# Altium PCB P1.PcbDoc
Units mm, origin at the board's own origin, x right, y up, seen from the top; angles counter-clockwise.
Board outline 82.04 x 67.06 mm, 2 copper layers (Top Layer, Bottom Layer), stack 1.671 mm thick; 22 components, 11 nets, 57 pads, 0 vias.
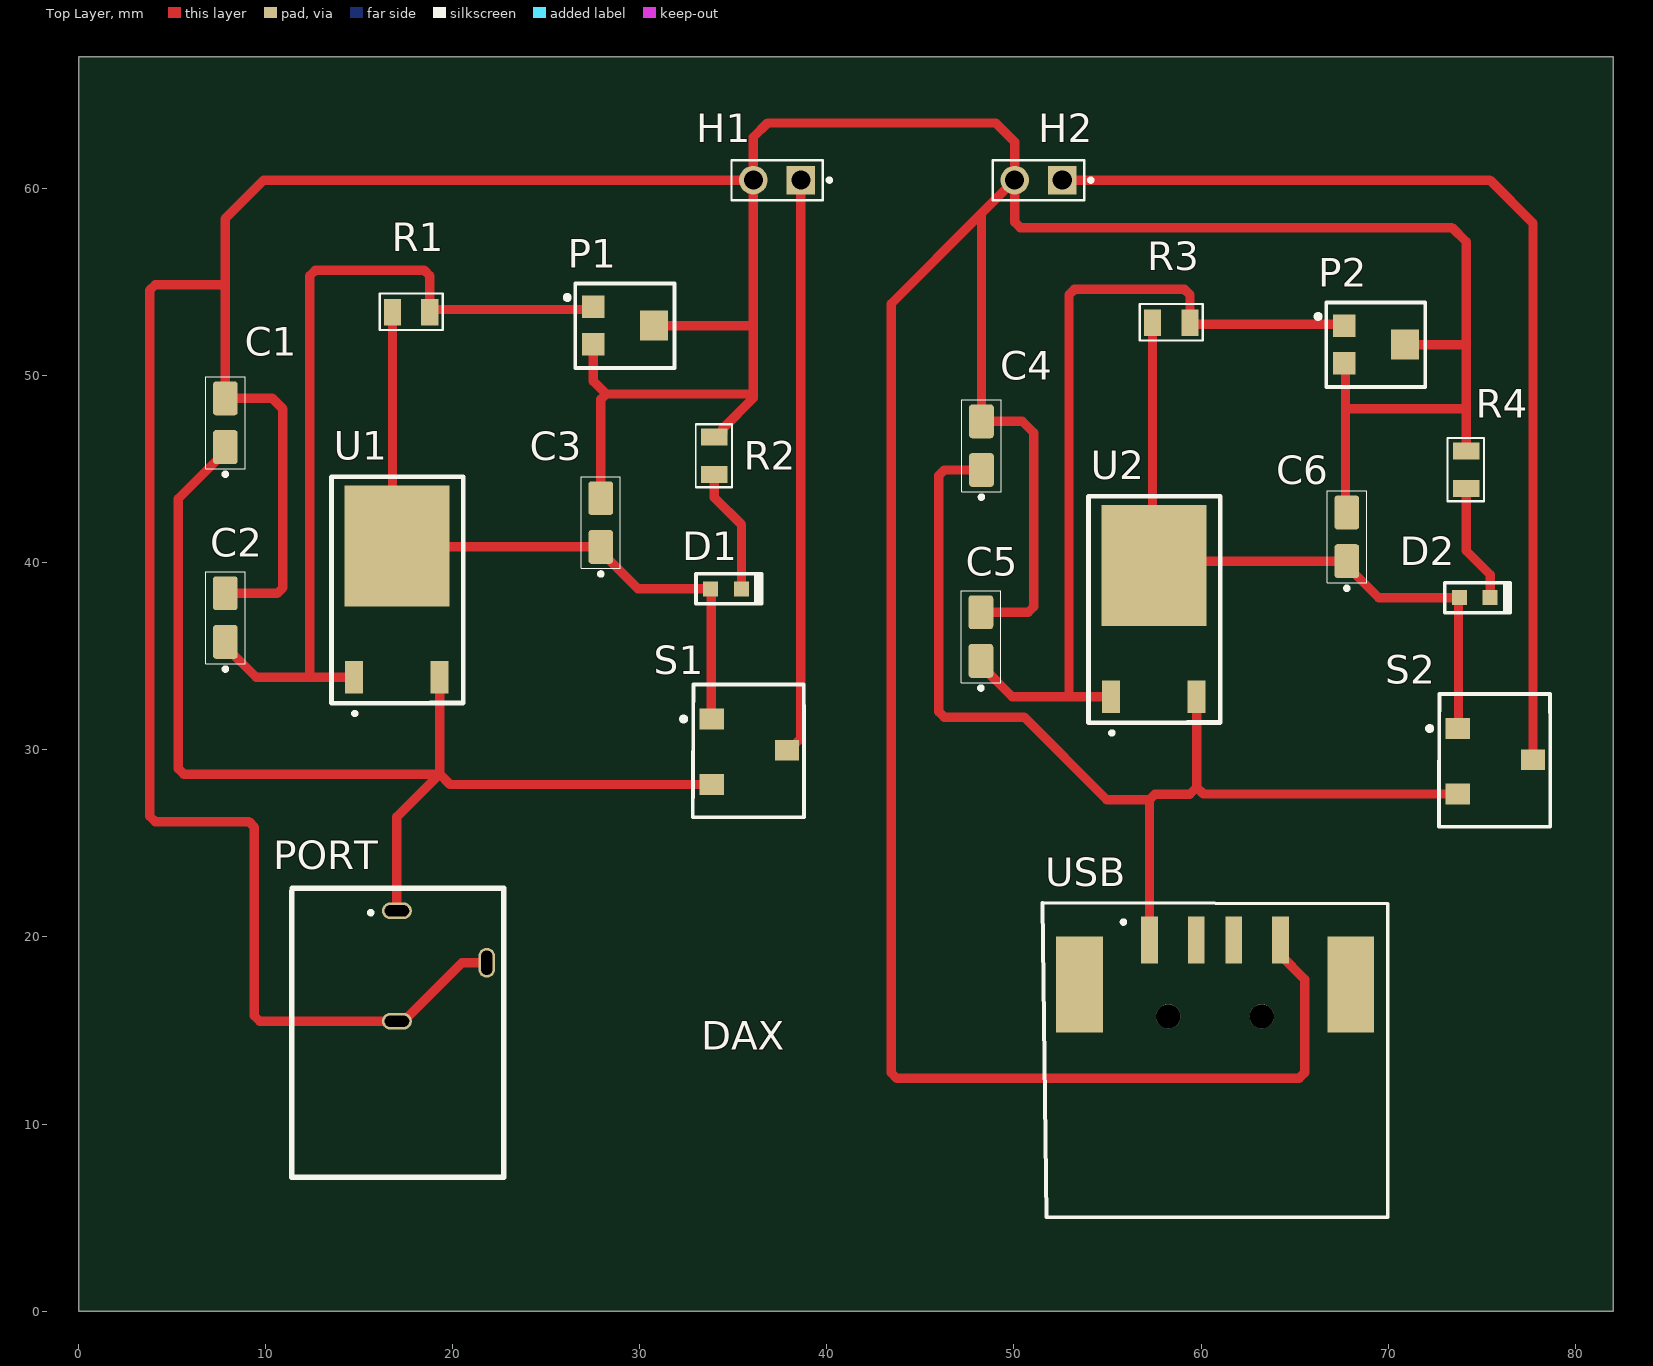
[diagram p0: Top Layer view]
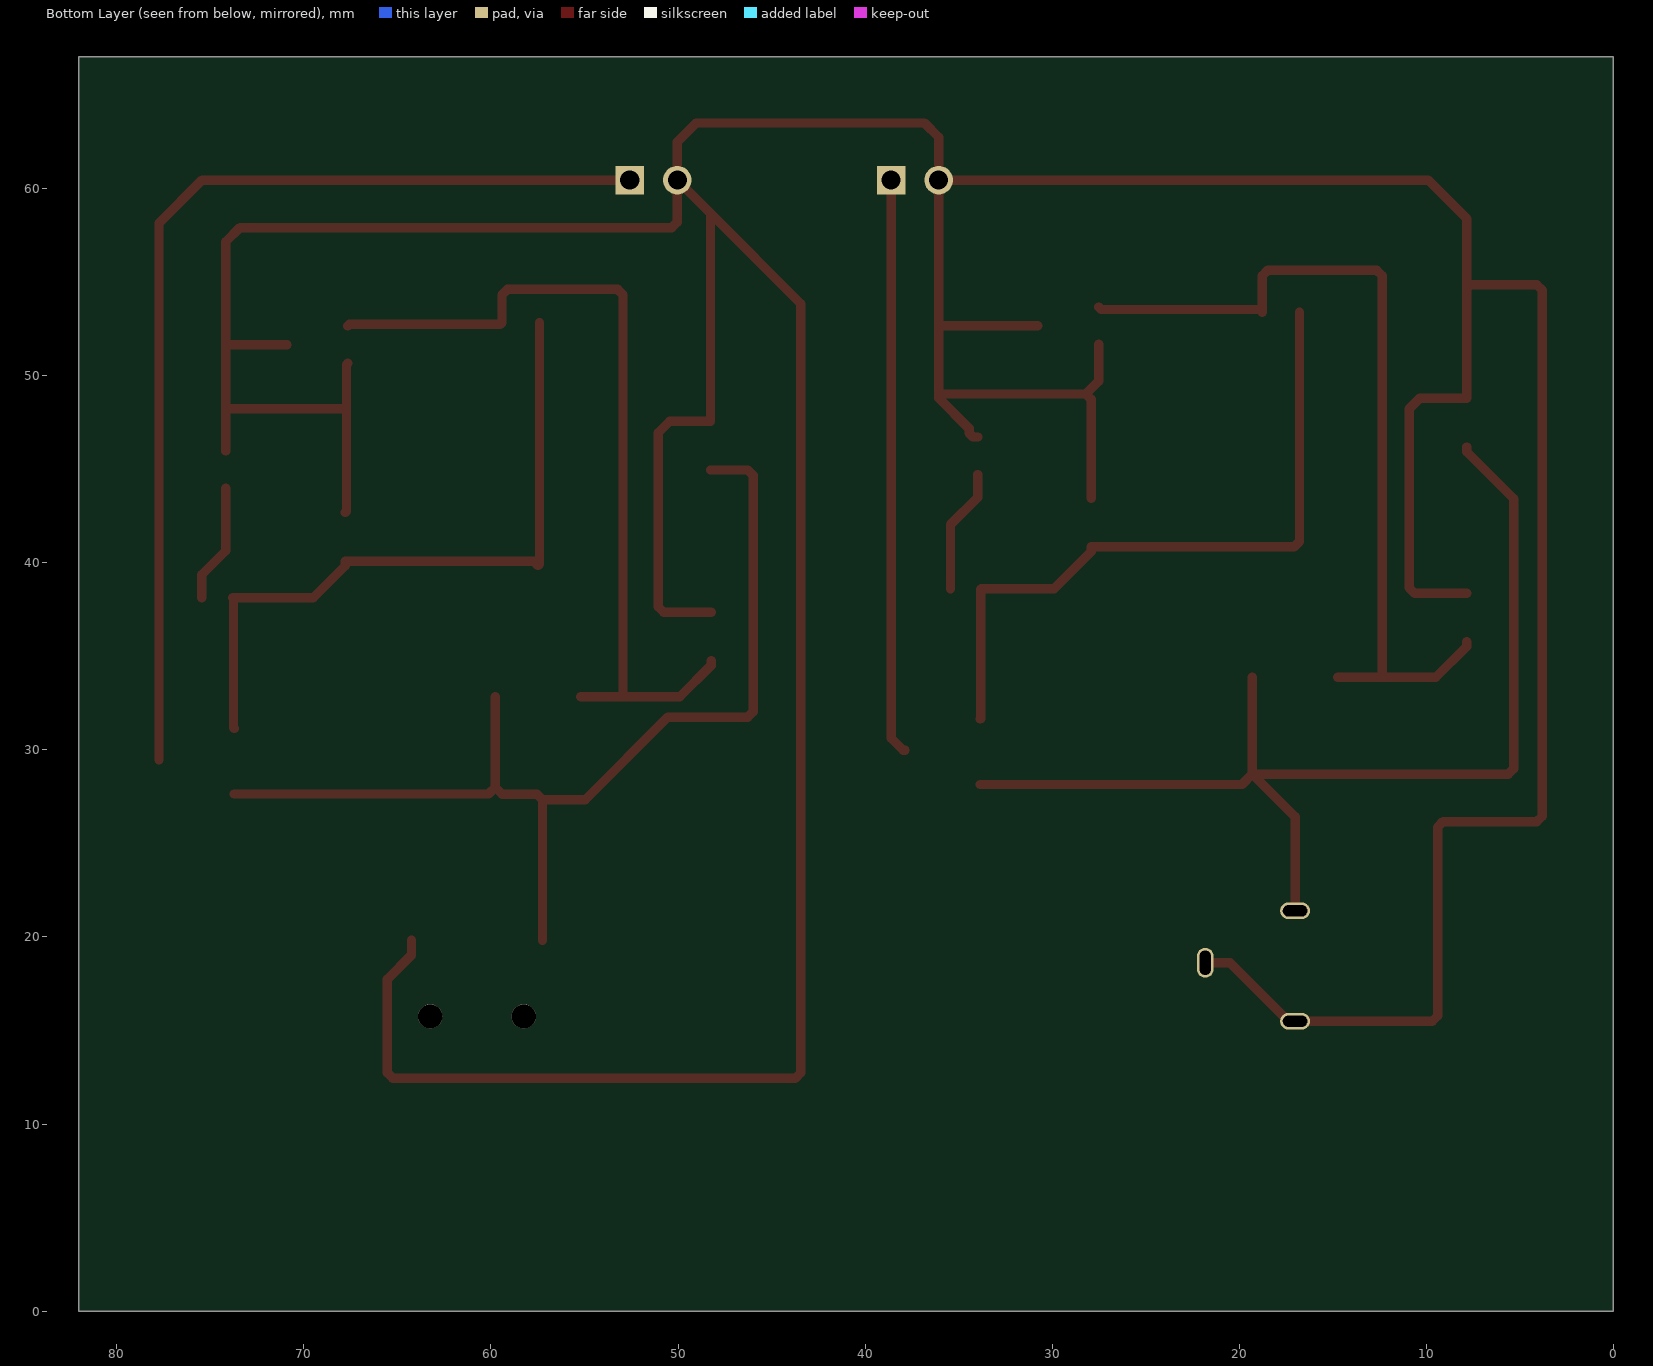
[diagram p1: Bottom Layer view, seen from below]
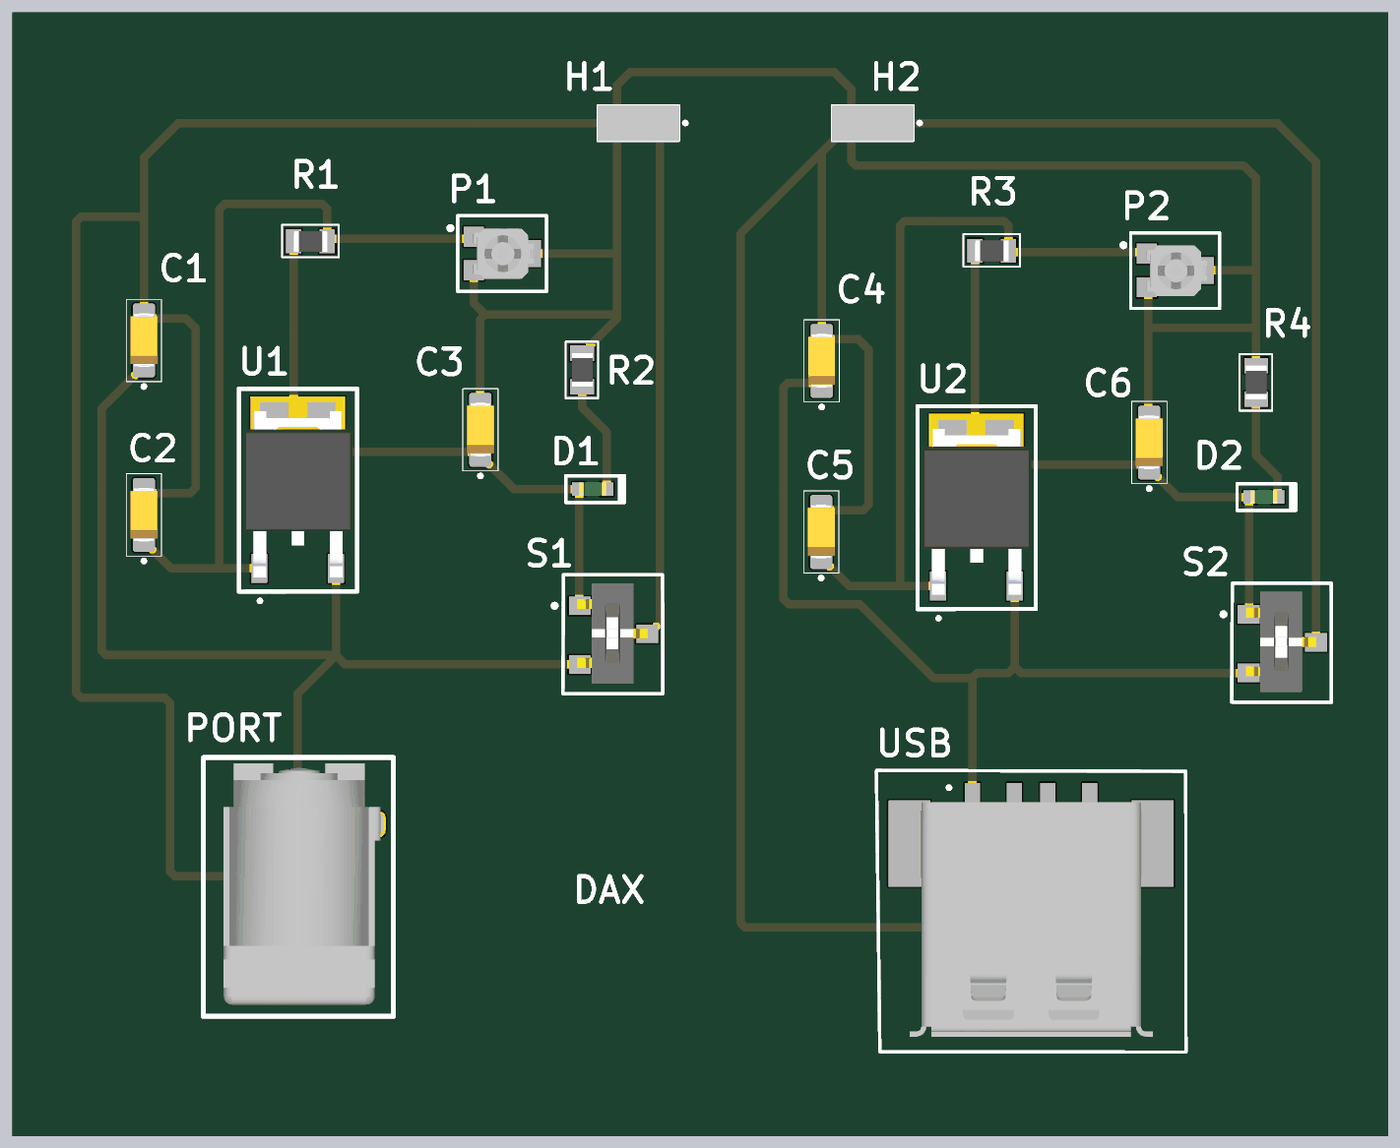
[diagram p2: 3D render of the assembled board from above, using the file's embedded part models]

## Layer stack, top to bottom
Top Solder: solder mask 0.0102, Solder Resist, Dk 3.5
Top Layer: signal copper 0.0356
Dielectric 1: dielectric 1.6, FR-4, Dk 4.8
Bottom Layer: signal copper 0.0356
Bottom Solder: solder mask 0.0102, Solder Resist, Dk 3.5

## Board outline
0,0 0,67.056 82.042,67.056 82.042,0

## Design rules (kind name [scope] priority, off if disabled: settings)
Clearance [All] p1: gap=0.3 ignorepadtopadclearanceinfootprint=FALSE
PolygonConnect [All] p1: connectstyle=Relief reliefconductorwidth=0.254 reliefentries=4 polygonreliefangle="90 Angle" airgapwidth=0.254
RoutingVias [All] p1: holewidth=0.3 width=0.6 viastyle="Through Hole" minholewidth=0.3 minwidth=0.6 maxholewidth=0.3 maxwidth=0.6
SolderMaskExpansion [All] p1: expansion=0.102 istentingtop=FALSE
Width [All] p1: maxlimit=1 minlimit=0.3 preferedwidth=0.5
30 further rules are at their usual default settings.

## Components (designator, comment, footprint, x,y, rotation, side; value= is the part's Value field where it differs from the comment)
C1 "10 µF" CAPACITORES 7.874,47.498 r90 top
C2 "10 µF" CAPACITORES 7.874,37.084 r90 top
C3 "10 µF" CAPACITORES 27.94,42.164 r90 top
C4 "10 µF" CAPACITORES 48.288,46.274 r90 top
C5 "10 µF" CAPACITORES 48.26,36.068 r90 top
C6 "10 µF" CAPACITORES 67.818,41.402 r90 top
D1 "Led" LEDS 34.653,38.575 r180 top
D2 "Led" LEDS 74.676,38.1 r180 top
H1 "header" HEADERS 37.338,60.452 r270 top
H2 "header" HEADERS 51.308,60.452 r270 top
P1 "1k" POTENCIOMETRO 28.956,52.832 r0 top
P2 "1k" POTENCIOMETRO 69.088,51.816 r0 top
PORT "9v" "PUERTO 9V" 16.918,15.719 r90 top (schematic designator Port)
R1 "Resistance" RESISTENCIAS 17.78,53.34 r180 top
R2 "Resistance" RESISTENCIAS 34.036,45.72 r270 top
R3 "Resistance" RESISTENCIAS 58.406,52.776 r180 top
R4 "Resistance" RESISTENCIAS 74.224,44.976 r270 top
S1 "Swich" SWITCHS 35.814,29.972 r0 top
S2 "Swich" SWITCHS 75.692,29.464 r0 top
U1 "LM317 AMDT/NOPB" LM317 16.94,36.347 r90 top
U2 "LM317 AMDT/NOPB" LM317 57.404,35.306 r90 top
USB "usb UJ2-AH-4-SMT-TR" USB 60.852,15.816 r0 top

## Footprints (in the part's own frame and the unit in brackets; to place one, negate y for a bottom-side part, rotate by r counter-clockwise, add the part's x,y. Pads: shape width x height; smd on the part's side, far side on the other; paste and mask are expansions set on the pad)
CAPACITORES [mm]
  rrect25% 1.81x1.32 smd: 1(-1.316,0.028) 2(1.284,0.028)
  silkscreen extent -2.87,-1.02 2.44,1.08, body extent -1.6,-0.78 1.6,0.82, height 1.81
HEADERS [mm]
  rect 1.53x1.53 hole 1.02: 1(0,1.27)
  round 1.53 hole 1.02: 2(0,-1.27)
  silkscreen extent -1.07,-2.44 1.07,2.89, body extent -1.07,-2.44 1.07,2.44, height 8.14
LEDS [mm]
  rect 0.8x0.8 smd: 1(-0.779,-0.033) 2(0.871,-0.033)
  silkscreen extent -1.85,-0.83 1.65,0.77, body extent -0.75,-0.43 0.85,0.37, height 0.4
LM317 [mm]
  rect 1.73x0.96 smd: ADJ(-2.473,2.207) IN(-2.473,-2.363)
  rect 6.49x5.63 smd paste-4: OUT(4.547,-0.078)
  silkscreen extent -4.5,-3.63 8.25,3.43, body extent -3,-3.37 6.91,3.17, height 2.55
POTENCIOMETRO [mm]
  rect 1.2x1.2 smd: 1(-1.438,0.84) 3(-1.438,-1.16)
  rect 1.5x1.6 smd: 2(1.812,-0.16)
  silkscreen extent -2.95,-2.43 2.9,2.09, body extent -1.5,-1.68 2.15,1.32, height 1.71
"PUERTO 9V" [mm]
  oval 0.9x1.6 hole 0.6 slot 1.3 at 90 deg: 1(5.675,-0.1) 2(-0.225,-0.1)
  oval 1.6x0.9 hole 0.6 slot 1.3 at 0 deg: 3(2.9,-4.9)
  silkscreen extent -8.57,-5.8 6.88,5.53, body extent -7.87,-5.05 6.52,4.31, height 10.81
RESISTENCIAS [mm]
  rect 0.92x1.42 smd: 1(-0.998,-0.056) 2(1.002,-0.056)
  silkscreen extent -1.7,-1.05 1.7,0.9, body extent -1,-0.67 1,0.58, height 0.51
SWITCHS [mm]
  rect 1.3x1.1 smd: 1(-1.975,1.675) 2(2.05,0) 3(-1.975,-1.825)
  silkscreen extent -3.59,-3.57 2.97,3.53, body extent -2.13,-2.98 2.08,3.02, height 2.43
USB [mm]
  rect 0.9x2.5 smd: 1(-3.606,4.012) 2(-1.106,4.012) 3(0.894,4.012) 4(3.394,4.012)
  rect 2.5x5.15 smd: SH1(-7.356,1.637) SH2(7.144,1.637)
  round 1.3 hole 1.3 unplated: ""(-2.606,-0.068) ""(2.394,-0.068)
  silkscreen extent -9.33,-10.8 9.13,6, body extent -8.05,-9.9 7.85,4.9, height 7.21

## Part data
C1 C2 C3 C4 C5 C6: library part "capacitores TAJA106K016SNJ", "AVX - TAJA106K016SNJ - Condensador de Tantalio SMD, 10 µF, 16 V, 1206 [Métrica 3216], TAJ Series, ± 10%, -55 °C", Capacitance=10uF, Case Code (Imperial)=1206, Case Code (Metric)=3216, ESR (Equivalent Series Resistance)=3R, Leakage Current=1.6uA, Manufacturer="Kyocera AVX", Manufacturer Part Number=TAJA106K016SNJ, Max Operating Temperature=125°C, Min Operating Temperature=-55°C, Package Quantity=1, Supplier Part Number 1=478-8875-1-ND, Tolerance=10%, Voltage Rating=16V, Case/Package=1206, Category="Tantalum Capacitors", ComponentLink1Description=https://datasheet.ciiva.com/12907/taj-27497-12907453.pdf?src-supplier=Mouser, ComponentLink1URL=https://datasheet.ciiva.com/12907/taj-27497-12907453.pdf?src-supplier=Mouser, ComponentLink2Description=https://datasheet.ciiva.com/29500/taj-29500092.pdf?src-supplier=Digi-Key, ComponentLink2URL=https://datasheet.ciiva.com/29500/taj-29500092.pdf?src-supplier=Digi-Key, ComponentLink3Description=https://datasheet.ciiva.com/29500/taj-29500093.pdf?src-supplier=Digi-Key, ComponentLink3URL=https://datasheet.ciiva.com/29500/taj-29500093.pdf?src-supplier=Digi-Key, ComponentLink4Description=https://datasheet.ciiva.com/29500/taj-29500094.pdf?src-supplier=Digi-Key, ComponentLink4URL=https://datasheet.ciiva.com/29500/taj-29500094.pdf?src-supplier=Digi-Key, Construction=Flat, Depth=1.6mm, Dissipation Factor=8%, Features="General Purpose", Height=1.8mm, Height - Seated (Max)=0.071inch, Lead Free="Lead Free", Length=3.2mm, Mount="Surface Mount", Number of Pins=2, Packaging="Tape and Reel", Polarity=Polar, Pricing 1="1=0,32000, 10=0,22600, 50=0,15780, 100=0,13530, 500=0,10148, 1000=0,08569, 2500=0,08118 (USD)", Radiation Hardening=No, RoHS=Yes, RoHS Compliant=Yes, Series=TAJ, Stock 1=7233, Supplier 1=Digi-Key, Termination=SMD/SMT, Voltage Rating (DC)=16V, Width=0.063inch
D1 D2: library part 598-8020-107F, "DIALIGHT   5988020107F   LED, RED ORANGE, 150MCD, 630NM", Case Code (Imperial)=0603, Case Code (Metric)=1608, Color=Red,Orange, Forward Current=20mA, Forward Voltage=2V, Illumination Color=Orange, Lens Color=Colorless,Clear, Manufacturer=Dialight, Max Operating Temperature=100°C, Min Operating Temperature=-30°C, Package Quantity=4000, Power Dissipation=55mW, Reverse Voltage=5V, Supplier Part Number 1=350-2030-1-ND, Case/Package=0603, Category=LEDs, ComponentLink1Description=https://datasheet.ciiva.com/2110/598-series-0603-pkg-2110282.pdf?src-supplier=Digi-Key, ComponentLink1URL=https://datasheet.ciiva.com/2110/598-series-0603-pkg-2110282.pdf?src-supplier=Digi-Key, ComponentLink2Description=https://datasheet.ciiva.com/2110/598-series-0603-pkg-2110283.pdf?src-supplier=Digi-Key, ComponentLink2URL=https://datasheet.ciiva.com/2110/598-series-0603-pkg-2110283.pdf?src-supplier=Digi-Key, ComponentLink3Description=https://datasheet.ciiva.com/2110/598-series-0603-pkg-2110284.pdf?src-supplier=Digi-Key, ComponentLink3URL=https://datasheet.ciiva.com/2110/598-series-0603-pkg-2110284.pdf?src-supplier=Digi-Key, ComponentLink4Description=https://datasheet.ciiva.com/15965/mdei5980603-15965337.pdf?src-supplier=Onlinecomponents.com, ComponentLink4URL=https://datasheet.ciiva.com/15965/mdei5980603-15965337.pdf?src-supplier=Onlinecomponents.com, ComponentLink5Description=https://datasheet.ciiva.com/15118/getdatasheetpartid-187920-15118028.pdf?src-supplier=Verical, ComponentLink5URL=https://datasheet.ciiva.com/15118/getdatasheetpartid-187920-15118028.pdf?src-supplier=Verical, ComponentLink6Description=https://datasheet.ciiva.com/30165/mdei5980603-30165653.pdf?src-supplier=Onlinecomponents.com, ComponentLink6URL=https://datasheet.ciiva.com/30165/mdei5980603-30165653.pdf?src-supplier=Onlinecomponents.com, ComponentLink7Description=https://datasheet.ciiva.com/16400/smt-selector-guide-16400462.pdf?src-supplier=Future+Electronics, ComponentLink7URL=https://datasheet.ciiva.com/16400/smt-selector-guide-16400462.pdf?src-supplier=Future+Electronics, ComponentLink8Description=https://datasheet.ciiva.com/7970/25658-7970173.pdf?src-supplier=Element14, ComponentLink8URL=https://datasheet.ciiva.com/7970/25658-7970173.pdf?src-supplier=Element14, ComponentLink9Description=https://datasheet.ciiva.com/14604/70081985-14604983.pdf?src-supplier=Allied+Electronics, ComponentLink9URL=https://datasheet.ciiva.com/14604/70081985-14604983.pdf?src-supplier=Allied+Electronics, Depth=0.8mm, Dominant Wavelength=625nm, Height=0.7mm, Lead Free="Lead Free", Length=1.6mm, Lens Size=0.8mm, Lens Style="Flat,Diffused,Colorless,Rectangular,WATER CLEAR", Lens Transparency=Clear, Luminous Intensity=150mcd, Manufacturer Part Number=598-8020-107F, Mount="Surface Mount", Number of Elements=1, Number of LEDs=1, Number of Pins=2, Packaging="Tape and Reel", Pricing 1="1=0,34000, 10=0,27100, 100=0,12160, 500=0,10982, 1000=0,09021, 2000=0,07844 (USD)", Radiation Hardening=No, REACH SVHC="No SVHC", RoHS=Yes, RoHS Compliant=Yes, Series=598, Stock 1=16102, Supplier 1=Digi-Key, Test Current=20mA, Viewing Angle=140°, Wavelength=630nm, Width=0.8mm
H1 H2: library part "header 5-146268-1", "02 MODII HDR DRST B/A 100 W/HD", Color=Black, Contact Current Rating=3A, Flammability Rating="UL94 V-0", High Temperature Housing=Yes, Insulation Resistance=5GR, Manufacturer="TE Connectivity", Manufacturer Part Number=5-146268-1, Max Operating Temperature=105°C, Min Operating Temperature=-65°C, Package Quantity=1040, Supplier Part Number 1=A121475-ND, Approvals=CSA, Board Standoff="Yes (With)", Category="Headers and Wire Housings", ComponentLink1Description=https://datasheet.ciiva.com/16361/5-146268-1-16361629.pdf?src-supplier=Future+Electronics, ComponentLink1URL=https://datasheet.ciiva.com/16361/5-146268-1-16361629.pdf?src-supplier=Future+Electronics, ComponentLink2Description=https://datasheet.ciiva.com/733/eng-cd-146268-h-146268-1-c-dwg-733414.pdf?src-supplier=Digi-Key, ComponentLink2URL=https://datasheet.ciiva.com/733/eng-cd-146268-h-146268-1-c-dwg-733414.pdf?src-supplier=Digi-Key, ComponentLink3Description=https://datasheet.ciiva.com/9467/eng-ds-1307819-ampmodu-0811-9467416.pdf?src-supplier=Avnet, ComponentLink3URL=https://datasheet.ciiva.com/9467/eng-ds-1307819-ampmodu-0811-9467416.pdf?src-supplier=Avnet, ComponentLink4Description=https://datasheet.ciiva.com/30079/eng-ds-1307819-ampmodu-0811-30079548.pdf?src-supplier=Onlinecomponents.com, ComponentLink4URL=https://datasheet.ciiva.com/30079/eng-ds-1307819-ampmodu-0811-30079548.pdf?src-supplier=Onlinecomponents.com, Connector Type=Plug,Header,Pin, Contact Finish - Mating=GOLD, Contact Gender=Male, Contact Material=Bronze, Contact Mating Length=0.23inch, Contact Plating=Gold,Tin,Matte, Contact Post Length=0.12inch, Contact Protection="No (Without)", Contact Shape=Square, Contact Type="Male Pin", Current Rating=3A, Depth=4.88mm, ELV=Compliant, Fastening Type=Pull, Gasket="No (Without)", High Speed Serial Data Connector=No, Housing Color=Black, Housing Material=Thermoplastic, Insulation Material=Polymer, Keyed=No, Lead Free="Lead Free", Length=2.13mm, Mating Alignment="No (Without)", Mating Connector Lock="No (Without)", Mount="Through Hole", Number of Contacts=2, Number of Positions=2, Number of Rows=2, Orientation=Straight, Packaging=Carton, PCB Mount Retention=With, PCB Mounting Orientation=Vertical, PCB Thickness=0.062inch, Pitch=2.54mm, Pricing 1="1=0,38000, 10=0,32300, 100=0,25090, 500=0,21510, 1000=0,17925, 5000=0,15364, 10000=0,14340 (USD)", Radiation Hardening=No, RoHS=Yes, RoHS Compliant=Yes, Row Spacing=2.54mm, Selectively Loaded="No (Without)", Series="AMPMODU MOD II", Stabilizers="No (Without)", Stock 1=803, Strain Relief="No (Without)", Supplier 1=Digi-Key, Termination="Through Hole"
P1 P2: library part "potenciometros 35WR1KLFTR", "BI TECHNOLOGIES / TT ELECTRONICS         35WR1KLFTR            TRIMMER CERMET,  3MM 1K", Insulation Resistance=100MR, Manufacturer="TT BI", Manufacturer Part Number=35WR1KLFTR, Max Operating Temperature=125°C, Min Operating Temperature=-40°C, Package Quantity=2000, Power Rating=100mW, Resistance=1kR, Resistance Tolerance=25%, Resistor Type=Cermet, Supplier Part Number 1=987-1812-1-ND, Temperature Coefficient=250ppm/°C, Voltage Rating=50V, Category="Variable Resistors and Potentiometers", ComponentLink1Description=https://datasheet.ciiva.com/12375/35-2231-12375495.pdf?src-supplier=Mouser, ComponentLink1URL=https://datasheet.ciiva.com/12375/35-2231-12375495.pdf?src-supplier=Mouser, ComponentLink2Description=https://datasheet.ciiva.com/22715/4701-22715103.pdf?src-supplier=Element14, ComponentLink2URL=https://datasheet.ciiva.com/22715/4701-22715103.pdf?src-supplier=Element14, ComponentLink3Description=https://datasheet.ciiva.com/7634/4701-7634924.pdf?src-supplier=Element14, ComponentLink3URL=https://datasheet.ciiva.com/7634/4701-7634924.pdf?src-supplier=Element14, Depth=3.65mm, Lead Free="Lead Free", Length=3mm, Military Standard=Not, Number of Turns=1, Packaging="Tape and Reel", Pricing 1="1=0,46000, 10=0,42200, 25=0,37680, 50=0,36400, 100=0,33800, 250=0,33152, 500=0,30550, 1000=0,26000 (USD)", REACH SVHC="No SVHC", RoHS=Yes, RoHS Compliant=Yes, Series=35, Stock 1=4304, Supplier 1=Digi-Key, Technology=CERMET, Termination=SMD/SMT, Tolerance=25%, Type=Potentiometer, Voltage Rating (DC)=50V, Width=1.55mm
PORT: library part 54-00133, "Conn DC Power RCP 2 POS Solder RA Thru-Hole 3 Terminal 1 Port", Current Rating=6A, Insulation Color=Black, Manufacturer=Tensility, Max Operating Temperature=85°C, Min Operating Temperature=-25°C, Supplier Part Number 1=839-1516-ND, Voltage Rating=48V, Body Material="Copper Alloy", Category=Connectors, ComponentLink1Description=http://www.tensility.com/pdffiles/54-00133.pdf?src-supplier=Digi-Key, ComponentLink1URL=http://www.tensility.com/pdffiles/54-00133.pdf?src-supplier=Digi-Key, Connector Type=Jack, Contact Material=Bronze,Brass, Contact Plating=Silver, Gender=Male, Housing Material=PBT, Manufacturer Part Number=54-00133, Mount="Through Hole", Packaging=Bulk, Pricing 1="1=1,05000, 10=0,88900, 25=0,85320, 50=0,83480, 100=0,79860, 250=0,72600, 500=0,65340, 1000=0,58080, 2500=0,52635 (USD)", RoHS=No, Shielding=Unshielded, Stock 1=4639, Supplier 1=Digi-Key, Termination=Solder
R1 R3: library part CRCW0805121RFKEA, "VISHAY         CRCW0805121RFKEA             SMD Chip Resistor, Thick Film, 121 ohm, 150 V, 0805 [2012 Metric], 125 mW,  1%, CRCW Series", Case Code (Imperial)=0805, Case Code (Metric)=2012, Manufacturer=Vishay, Max Operating Temperature=155°C, Max Power Dissipation=125mW, Min Operating Temperature=-55°C, Package Quantity=10, Resistance=121R, Resistance Tolerance=1%, Resistor Type="Thick Film", Supplier Part Number 1=541-121CCT-ND, Temperature Coefficient=100ppm/°C, Voltage Rating=150V, Case/Package=0805, Category="Chip SMD Resistors", ComponentLink1Description=https://datasheet.ciiva.com/11810/0900766b80d98b26-11810986.pdf?src-supplier=RSComponents, ComponentLink1URL=https://datasheet.ciiva.com/11810/0900766b80d98b26-11810986.pdf?src-supplier=RSComponents, ComponentLink2Description=https://datasheet.ciiva.com/2467/dcrcwe3-2467515.pdf?src-supplier=Digi-Key, ComponentLink2URL=https://datasheet.ciiva.com/2467/dcrcwe3-2467515.pdf?src-supplier=Digi-Key, ComponentLink3Description=https://datasheet.ciiva.com/2467/dcrcwe3-2467516.pdf?src-supplier=Digi-Key, ComponentLink3URL=https://datasheet.ciiva.com/2467/dcrcwe3-2467516.pdf?src-supplier=Digi-Key, ComponentLink4Description=https://datasheet.ciiva.com/2467/dcrcwe3-2467517.pdf?src-supplier=Digi-Key, ComponentLink4URL=https://datasheet.ciiva.com/2467/dcrcwe3-2467517.pdf?src-supplier=Digi-Key, ComponentLink5Description=https://datasheet.ciiva.com/3258/dcrcwe3-3258073.pdf?src-supplier=Avnet, ComponentLink5URL=https://datasheet.ciiva.com/3258/dcrcwe3-3258073.pdf?src-supplier=Avnet, ComponentLink6Description=https://datasheet.ciiva.com/3258/dcrcwe3-3258074.pdf?src-supplier=Avnet, ComponentLink6URL=https://datasheet.ciiva.com/3258/dcrcwe3-3258074.pdf?src-supplier=Avnet, ComponentLink7Description=https://datasheet.ciiva.com/16449/dcrcwe3-16449435.pdf?src-supplier=Future+Electronics, ComponentLink7URL=https://datasheet.ciiva.com/16449/dcrcwe3-16449435.pdf?src-supplier=Future+Electronics, ComponentLink8Description=https://datasheet.ciiva.com/7823/1697337-7823048.pdf?src-supplier=Element14, ComponentLink8URL=https://datasheet.ciiva.com/7823/1697337-7823048.pdf?src-supplier=Element14, ComponentLink9Description=https://datasheet.ciiva.com/22868/70201119-22868607.pdf?src-supplier=Allied+Electronics, ComponentLink9URL=https://datasheet.ciiva.com/22868/70201119-22868607.pdf?src-supplier=Allied+Electronics, ComponentLink10Description=https://datasheet.ciiva.com/16785/70201119-16785064.pdf?src-supplier=Allied+Electronics, ComponentLink10URL=https://datasheet.ciiva.com/16785/70201119-16785064.pdf?src-supplier=Allied+Electronics, Construction=Rectangular, Contact Plating=Tin, Depth=1.25mm, Features="Automotive AEC-Q200", Height=0.45mm, Lead Free="Lead Free", Length=2mm, Manufacturer Part Number=CRCW0805121RFKEA, Military Standard=Not, Number of Terminations=2, Packaging="Tape and Reel", Power Rating=125mW, Pricing 1="1=0,10000, 10=0,06700, 100=0,02710, 1000=0,01219, 2500=0,01058 (USD)", Radiation Hardening=No, REACH SVHC=Unknown, RoHS=Yes, RoHS Compliant=Yes, Series=CRCW, Size Code=0805, Stock 1=8546, Supplier 1=Digi-Key, Technology="THICK FILM", Termination=SMD/SMT, Tolerance=1%, Voltage Rating (DC)=150V, Weight=0.000194oz, Width=1.25mm
R2 R4: library part RCS0805470RJNEA, "RES SMD 470 OHM 5% 0.4W 0805", Case Code (Imperial)=0805, Case Code (Metric)=2012, Manufacturer="Vishay Dale", Max Operating Temperature=155°C, Max Power Dissipation=400mW, Min Operating Temperature=-55°C, Resistance=470R, Resistor Type="Thick Film", Supplier Part Number 1=541-2863-1-ND, Temperature Coefficient=200ppm/°C, Tolerance=5%, Case/Package=0805, Category="Chip SMD Resistors", ComponentLink1Description=http://www.vishay.com/docs/20065/rcse3.pdf?src-supplier=Digi-Key, ComponentLink1URL=http://www.vishay.com/docs/20065/rcse3.pdf?src-supplier=Digi-Key, Features="Automotive AEC-Q200", Height=0.02inch, Length=0.079inch, Manufacturer Part Number=RCS0805470RJNEA, Number of Terminations=2, Packaging="Tape and Reel", Pricing 1="1=0,20000, 10=0,16600, 100=0,06480, 1000=0,02712, 2500=0,02486 (USD)", RoHS=Yes, Stock 1=4002, Supplier 1=Digi-Key, Width=0.049inch
S1 S2: library part "switch CJS-1201TB", "Switch Slide DIP SPDT 100MA 6V", Current Rating=100mA, Manufacturer="Nidec Copal", Manufacturer Part Number=CJS-1201TB, Max Operating Temperature=85°C, Max Voltage Rating (DC)=24V, Min Operating Temperature=-40°C, Supplier Part Number 1=563-1024-1-ND, Voltage Rating (DC)=6V, Actuator Type="Slide (Standard)", Body Material=Polyphenylene, Category="Slide Switches", ComponentLink1Description=https://datasheet.ciiva.com/2864/cjs-2864001.pdf?src-supplier=Digi-Key, ComponentLink1URL=https://datasheet.ciiva.com/2864/cjs-2864001.pdf?src-supplier=Digi-Key, ComponentLink2Description=https://datasheet.ciiva.com/2864/cjs-2864002.pdf?src-supplier=Digi-Key, ComponentLink2URL=https://datasheet.ciiva.com/2864/cjs-2864002.pdf?src-supplier=Digi-Key, ComponentLink3Description=https://datasheet.ciiva.com/2864/cjs-2864003.pdf?src-supplier=Digi-Key, ComponentLink3URL=https://datasheet.ciiva.com/2864/cjs-2864003.pdf?src-supplier=Digi-Key, Contact Material="Copper Alloy", Contact Plating=Gold, Electrical Life=200Cycles, Lead Free="Lead Free", Length=0.236inch, Mount="Surface Mount", Number of Positions=2, Orientation=Vertical, Packaging="Tape and Reel", Pricing 1="1=1,02000, 10=0,98500, 25=0,92040, 100=0,79920, 250=0,72720, 500=0,67418 (USD)", Radiation Hardening=No, RoHS=Yes, RoHS Compliant=Yes, Series=CJS, Stock 1=6035, Supplier 1=Digi-Key, Termination="Gull Wing", Throw Configuration=SPDT, Washable=Yes
U1 U2: "IC REG LIN POS ADJ 1.5A TO252-3", Case/Package=TO-252, Dropout Voltage=170mV, Manufacturer="TI National Semiconductor", Manufacturer Part Number=LM317AMDT/NOPB, Max Input Voltage=40V, Max Operating Temperature=125°C, Max Output Current=500mA, Max Output Voltage=37V, Min Input Voltage=4.2V, Min Operating Temperature=-40°C, Min Output Voltage=1.2V, Output Voltage Accuracy=1%, Power Supply Rejection Ratio (PSRR)=80dB, Quiescent Current=60uA, Reference Voltage=1.262V, Supplier Part Number 1=LM317AMDT/NOPB-ND, Tolerance=2%, Accuracy=1%, Category="Voltage Regulators - Linear", ComponentLink1Description=https://datasheet.ciiva.com/19477/837871-19477914.pdf?src-supplier=Jameco, ComponentLink1URL=https://datasheet.ciiva.com/19477/837871-19477914.pdf?src-supplier=Jameco, ComponentLink2Description=https://datasheet.ciiva.com/3223/lm317-n-3223656.pdf?src-supplier=Avnet, ComponentLink2URL=https://datasheet.ciiva.com/3223/lm317-n-3223656.pdf?src-supplier=Avnet, ComponentLink3Description=https://datasheet.ciiva.com/6595/lm117-6595310.pdf?src-supplier=Digi-Key, ComponentLink3URL=https://datasheet.ciiva.com/6595/lm117-6595310.pdf?src-supplier=Digi-Key, ComponentLink4Description=https://datasheet.ciiva.com/1512/1882329-1512362.pdf?src-supplier=Element14, ComponentLink4URL=https://datasheet.ciiva.com/1512/1882329-1512362.pdf?src-supplier=Element14, Contact Plating=Tin, Height=2.3mm, Lead Free="Lead Free", Length=6.58mm, Mount="Surface Mount", Number of Outputs=1, Number of Pins=3, Output Current=500mA, Output Type=Adjustable, Output Voltage=37V, Packaging=Rail/Tube, Polarity=Positive, Pricing 1="1=2,66000, 10=2,38800, 25=2,25240, 100=1,91910, 250=1,80200, 500=1,57676, 1000=1,48750 (USD)", Radiation Hardening=No, REACH SVHC="No SVHC", RoHS=Yes, RoHS Compliant=Yes, Series=LM317-N, Stock 1=194, Supplier 1=Digi-Key, Weight=0.063493oz, Width=6.1mm
USB: "USB jack 2.0, standard A type, 4 pin, horizontal, 30 µin plating, SMT", Manufacturer=CUI, Manufacturer Part Number=UJ2-AH-4-SMT-TR, RoHS=Yes, Supplier 1="Arrow Electronics", Supplier Part Number 1=UJ2-AH-4-SMT-TR

## Nets (pads, with @x,y where several pads share a name; then routed paths per layer and width w, separated by ;. In a path a pad name is that pad's centre, name@x,y a point inside that pad or via, vN(x,y) a via of type N, cw(c..) or ccw(c..) an arc to the next point about the centre after c; other vN are vias at no path point)
GND: C1.2 C2.2 C3.2 C4.2 C5.2 C6.2 H1.2 H2.2 P1.2 P1.3 P2.2 P2.3 PORT.2 PORT.3 R2.1 R4.1 USB.4 | length 335.2
  Top Layer w0.5: C2.2 10.629,38.368 10.922,38.661 10.922,48.221 10.361,48.782 C1.2 7.846,54.659 ; PORT.3 20.493,18.619 17.368,15.494 PORT.2 9.691,15.494 9.398,15.787 9.398,25.869 9.105,26.162 4.103,26.162 3.81,26.455 3.81,54.571 4.103,54.864 7.641,54.864 7.846,54.659 ; P1.3 27.518,49.709 28.205,49.022 ; C3.2 27.912,48.729 28.205,49.022 ; P1.2 35.937,52.672 36.068,52.541 ; R2.1 34.23,46.718 34.44,46.928 34.44,47.178 36.068,48.806 ; C5.2 50.761,37.352 51.054,37.645 51.054,46.951 50.447,47.558 C4.2 48.26,58.674 ; USB.4 64.246,19.028 65.532,17.742 65.532,12.739 65.239,12.446 43.727,12.446 43.434,12.739 43.434,53.848 48.26,58.674 ; P2.3 67.72,50.586 67.72,48.081 ; C6.2 67.72,42.756 67.72,48.081 ; P2.2 74.064,51.656 74.168,51.552 ; R4.1 74.168,48.229 ; 7.846,54.659 7.846,58.392 9.906,60.452 H1.2 ; 28.205,49.022 35.852,49.022 36.068,48.806 ; 36.068,48.806 36.068,52.541 ; 36.068,52.541 H1.2 ; H1.2 36.068,62.738 36.83,63.5 49.022,63.5 50.038,62.484 H2.2 ; 48.26,58.674 H2.2 ; H2.2 50.038,58.205 50.331,57.912 73.406,57.912 74.168,57.15 74.168,51.552 ; 67.72,48.081 67.868,48.229 74.168,48.229 ; 74.168,48.229 74.168,51.552
NetC2_1: C2.1 P1.1 R1.1 U1.ADJ | length 46.7
  Top Layer w0.5: C2.1 7.846,35.523 9.495,33.874 12.355,33.874 ; U1.ADJ 12.355,33.874 ; P1.1 27.38,53.534 18.916,53.534 R1.1 18.778,55.333 18.485,55.626 12.648,55.626 12.355,55.333 12.355,33.874
NetC3_1: C3.1 D1.2 R1.2 S1.1 U1.OUT | length 37.4
  Top Layer w0.5: R1.2 16.778,41.134 U1.OUT 17.064,40.848 C3.1 27.912,40.603 29.907,38.608 D1.2 33.811,38.579 33.811,31.675 S1.1
NetC5_1: C5.1 P2.1 R3.1 U2.ADJ | length 45.9
  Top Layer w0.5: C5.1 48.232,34.507 49.906,32.833 52.937,32.833 ; U2.ADJ 52.937,32.833 ; P2.1 67.562,52.744 59.492,52.744 R3.1 59.404,54.317 59.111,54.61 53.23,54.61 52.937,54.317 52.937,32.833
NetC6_1: C6.1 D2.2 R3.2 S2.1 U2.OUT | length 37.4
  Top Layer w0.5: R3.2 57.404,39.931 U2.OUT 57.715,40.086 C6.1 67.79,39.841 69.498,38.133 D2.2 73.761,38.089 73.761,31.183 S2.1
NetD1_1: D1.1 R2.2 | length 6.7
  Top Layer w0.5: R2.2 33.98,43.49 35.432,42.038 D1.1
NetD2_1: D2.1 R4.2 | length 6.4
  Top Layer w0.5: R4.2 74.168,40.64 75.455,39.353 D2.1
NetH1_1: H1.1 S1.2 | length 30.8
  Top Layer w0.5: S1.2 37.964,29.972 38.608,30.616 H1.1
NetH2_1: H2.1 S2.2 | length 54.8
  Top Layer w0.5: H2.1 75.438,60.452 77.742,58.148 S2.2
Vin1: C1.1 PORT.1 S1.3 U1.IN | length 60.5
  Top Layer w0.5: C1.1 7.846,45.937 5.334,43.425 5.334,28.995 5.627,28.702 19.303,28.702 ; PORT.1 17.018,26.417 19.303,28.702 ; U1.IN 19.303,28.702 ; S1.3 19.858,28.147 19.303,28.702
Vin2: C4.1 S2.3 U2.IN USB.1 | length 57.5
  Top Layer w0.5: C4.1 46.267,44.958 45.974,44.665 45.974,32.043 46.267,31.75 50.546,31.75 54.96,27.336 57.246,27.336 ; USB.1 57.246,27.336 ; U2.IN 59.767,27.999 ; S2.3 60.127,27.639 59.767,27.999 ; 57.246,27.336 57.539,27.629 59.397,27.629 59.767,27.999
pads on no net: USB. USB.2 USB.3 USB.SH1 USB.SH2

## Silkscreen, mask and mechanical layers (free items; w line width, h text height)
Top Overlay:
  text "DAX" at 33.274,13.97 h1.52
Board Outline:
  the board outline again, w0.1